# Altium PCB sensor_board.PcbDoc
Units mil, origin at the board's own origin, x right, y up, seen from the top; angles counter-clockwise.
Board outline 3088 x 2050 mil, 2 copper layers (Top, Bottom), stack 61.811 mil thick; 13 components, 13 nets, 45 pads, 4 vias.
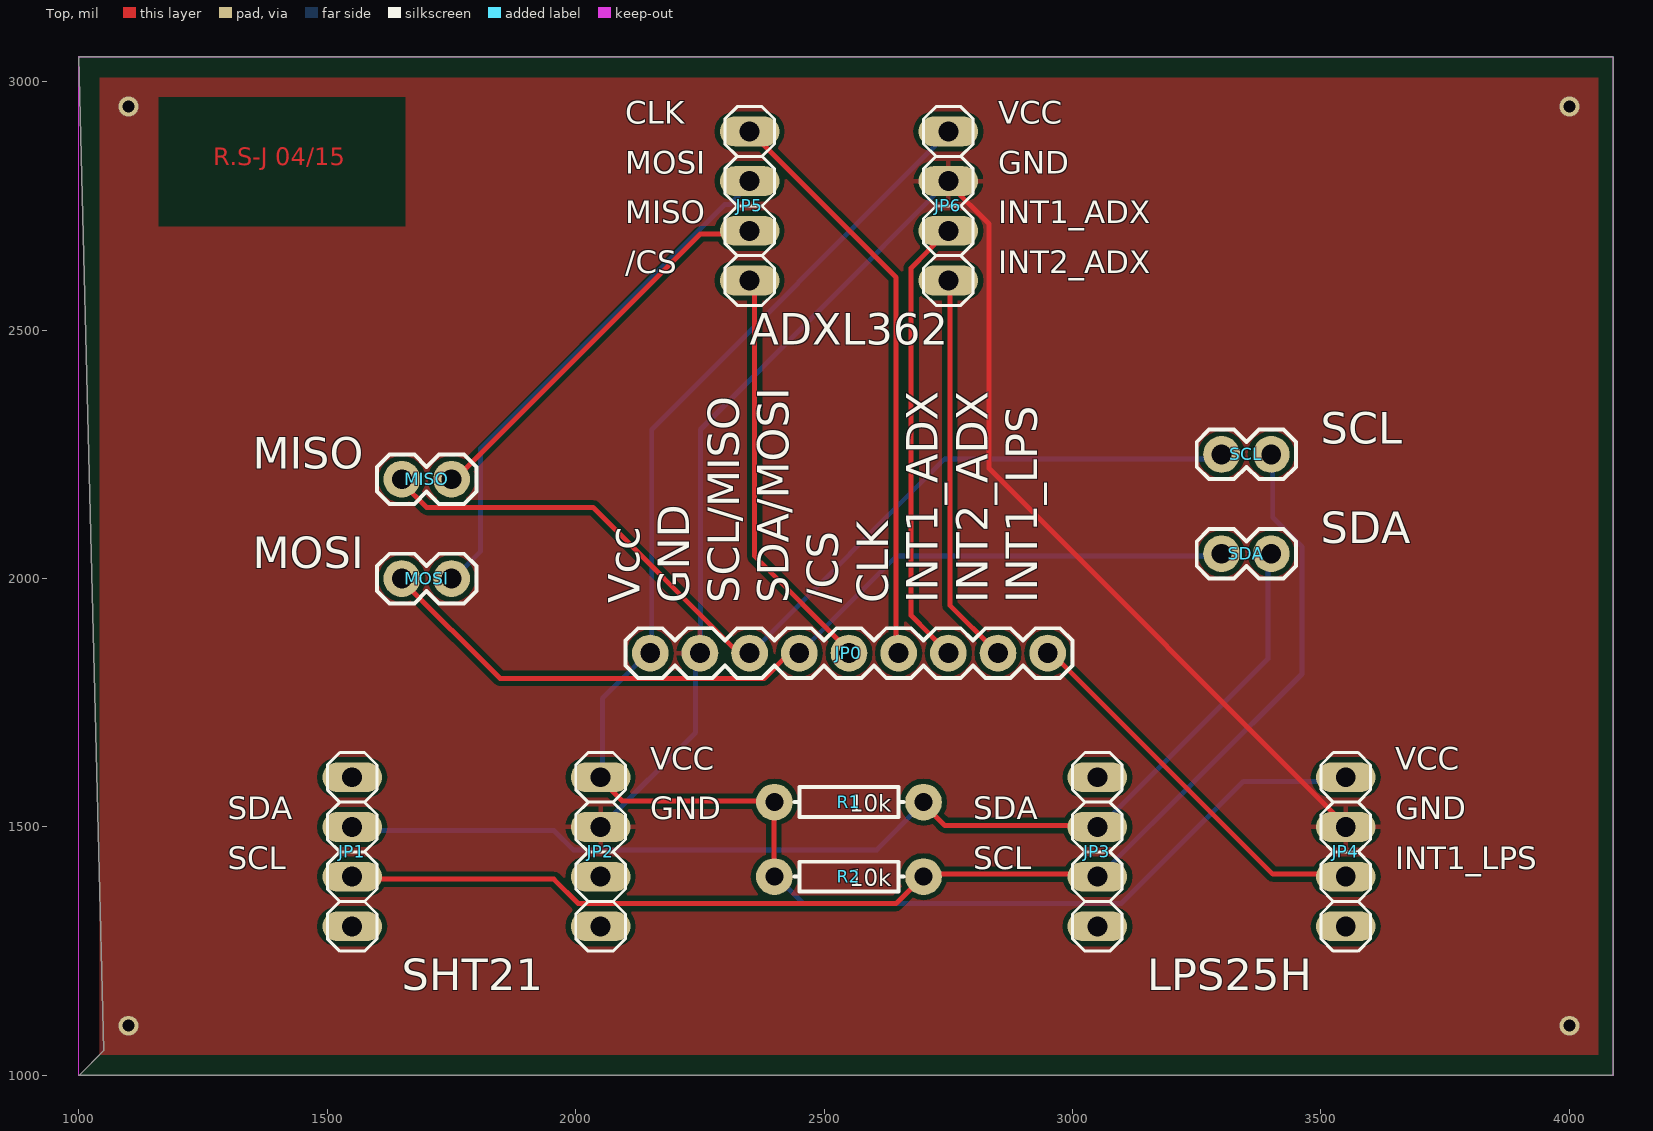
[diagram p0: Top view]
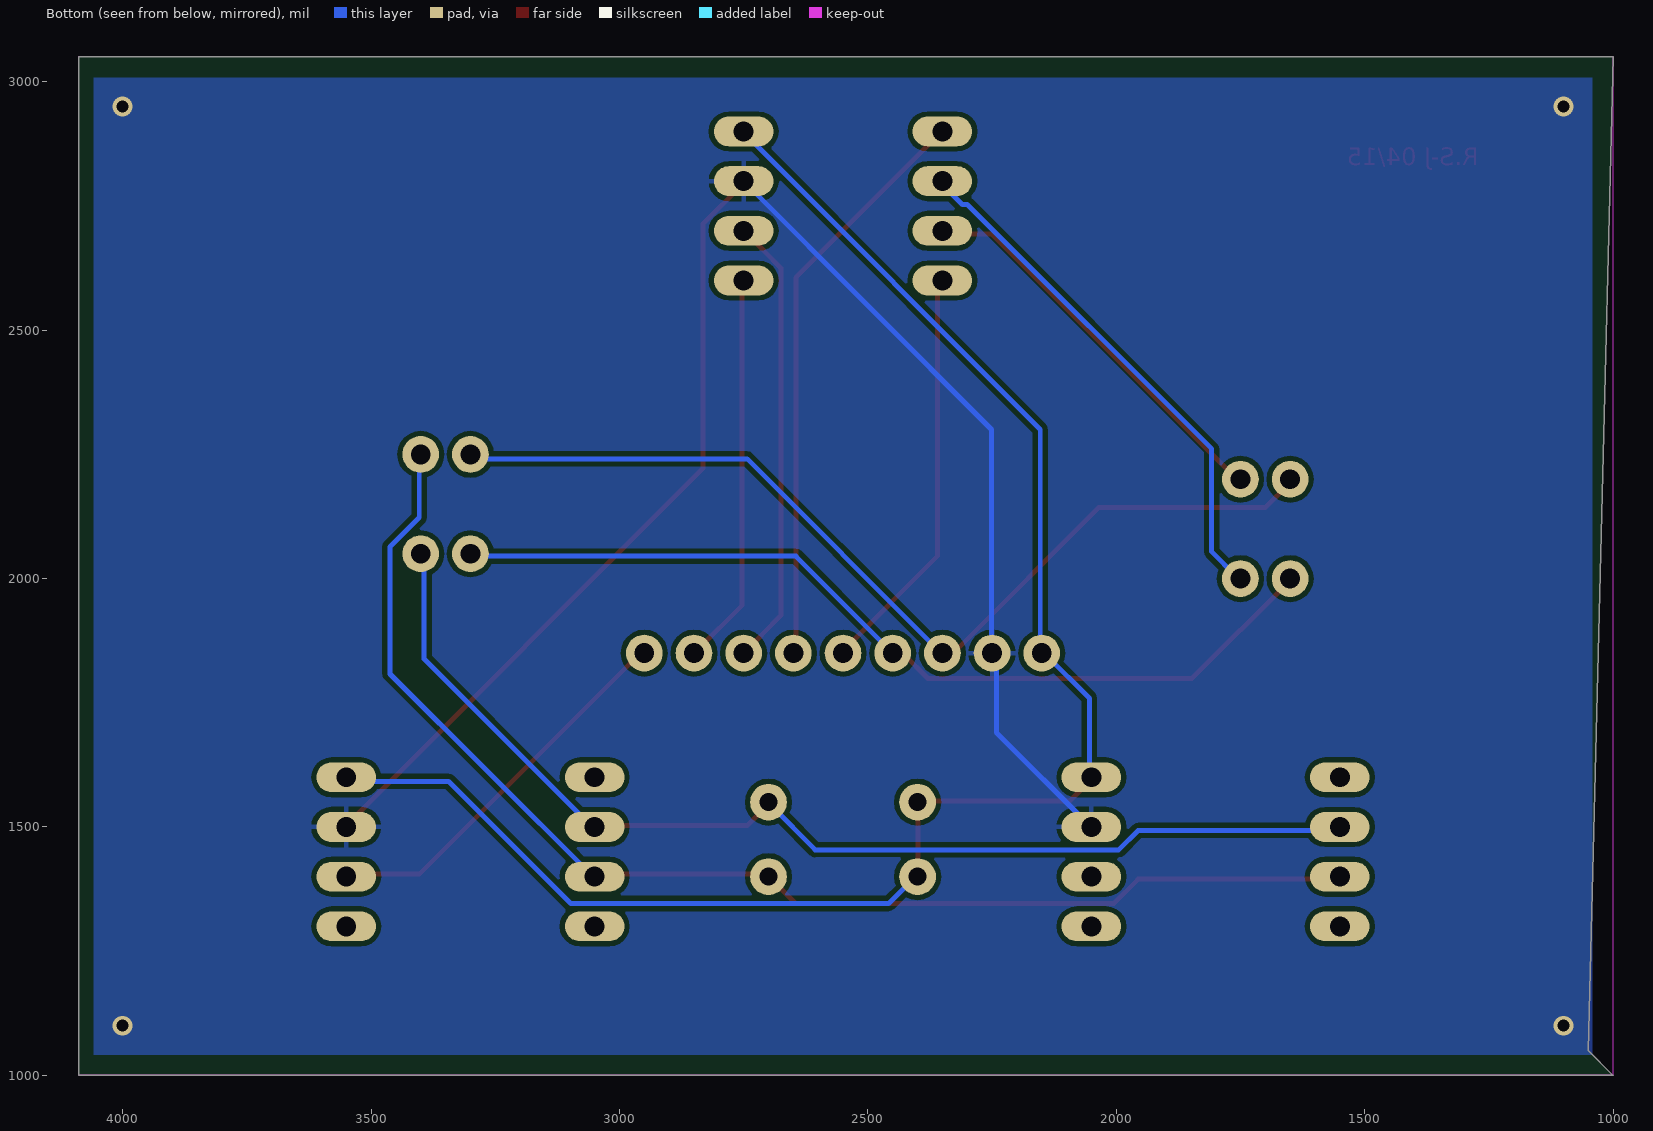
[diagram p1: Bottom view, seen from below]

## Layer stack, top to bottom
Top Solder: solder mask 0.4, Solder Resist, Dk 3.5
Top: signal copper 1.378
Dielectric 1: core 59.0551, FR-4, Dk 4.8
Bottom: signal copper 1.378
Bottom Solder: solder mask 0.4, Solder Resist, Dk 3.5

## Board outline
1000,1000 4088,1000 4088,3050 1000,3050 1050,1050

## Design rules (kind name [scope] priority, off if disabled: settings)
Clearance mdViaVia [IsVia vs IsVia] p1: gap=9.84
Clearance mdPadVia [IsPad vs IsVia] p2: gap=9.84
Clearance mdPadPad [IsPad vs IsPad] p3: gap=9.84
Clearance mdWireVia [(InLayerClass('Signal Layers') AND IsTrack) vs IsVia] p4: gap=9.84
Clearance mdWirePad [(InLayerClass('Signal Layers') AND IsTrack) vs IsPad] p5: gap=9.84
Clearance mdWireWire [(InLayerClass('Signal Layers') AND IsTrack) vs (InLayerClass('Signal Layers') AND IsTrack)] p6: gap=9.84
Clearance [All] p7: gap=9.84
HoleSize [All] p1: absolutevalues=TRUE maxlimit=100000 minlimit=11.81 maxpercent=80.000 minpercent=20.000
HoleToHoleClearance [All] p1: gap=8 allowstackedmicrovias=TRUE
PolygonConnect ThermalVias [IsVia] p1: connectstyle=Direct reliefconductorwidth=10 reliefentries=4 polygonreliefangle="90 Angle" airgapwidth=10
PolygonConnect [All] p2: connectstyle=Relief reliefconductorwidth=10 reliefentries=4 polygonreliefangle="90 Angle" airgapwidth=10
RoutingVias [All] p1: holewidth=28 width=50 viastyle="Through Hole" minholewidth=28 minwidth=50 maxholewidth=28 maxwidth=50
SilkToSilkClearance [All] p1 off: silktosilkclearance=10
SilkToSolderMaskClearance [IsPad] p1 off: minsilkscreentomaskgap=10 clearancetoexposedcopper=TRUE
SolderMaskExpansion [All] p1: expansion=4
UnpouredPolygon [All] p1: allowunpoured=FALSE
Width [All] p1: maxlimit=100000 minlimit=9.84 preferedwidth=10
25 further rules are at their usual default settings.

## Components (designator, comment, footprint, x,y, rotation, side; value= is the part's Value field where it differs from the comment)
JP0 "" 1X09 2150,1850 r0 top
JP1 "" 1X04 1550,1450 r270 top
JP2 "" 1X04 2050,1450 r270 top
JP3 "" 1X04 3050,1450 r270 top
JP4 "" 1X04 3550,1450 r270 top
JP5 "" 1X04 2350,2750 r270 top
JP6 "" 1X04 2750,2750 r270 top
MISO "" 1X02 1650,2200 r0 top
MOSI "" 1X02 1650,2000 r0 top
R1 "10k" AXIAL-0.3 2550,1550 r180 top
R2 "10k" AXIAL-0.3 2550,1400 r180 top
SCL "" 1X02 3300,2250 r0 top
SDA "" 1X02 3300,2050 r0 top

## Footprints (in the part's own frame and the unit in brackets; to place one, negate y for a bottom-side part, rotate by r counter-clockwise, add the part's x,y. Pads: shape width x height; smd on the part's side, far side on the other; paste and mask are expansions set on the pad)
1X02 [mil] "1X02"
  round 74 hole 40: 1(0,0) 2(100,0)
  silkscreen extent -50,-50 150,50
1X04 [mil] "1X04"
  oval 60x120 hole 40: 1(-150,0) 2(-50,0) 3(50,0) 4(150,0)
  silkscreen extent -200,-50 200,50
1X09 [mil] "1X09"
  round 74 hole 40: 1(0,0) 2(100,0) 3(200,0) 4(300,0) 5(400,0) 6(500,0) 7(600,0) 8(700,0) 9(800,0)
  silkscreen extent -50,-50 850,50
AXIAL-0.3 [mil] "AXIAL-0.3"
  round 74 hole 36: P$1(-150,0) P$2(150,0)
  silkscreen extent -110,-30 110,30

## Part data
JP0: library part 1X09
JP1 JP2 JP3 JP4 JP5 JP6: library part 1X04
MISO MOSI SCL SDA: library part 1X02
R1 R2: library part AXIAL-0.3

## Via types
v1: diameter 40/40 (per signal layer), hole 24, Top to Bottom, 4 vias

## Nets (pads, with @x,y where several pads share a name; then routed paths per layer and width w, separated by ;. In a path a pad name is that pad's centre, name@x,y a point inside that pad or via, vN(x,y) a via of type N, cw(c..) or ccw(c..) an arc to the next point about the centre after c; other vN are vias at no path point)
/CS: JP0.5 JP5.4 | length 834.8
  Top w10: JP5.4 2360,2596 2360,2045 2547,1858 JP0.5
CLK: JP0.6 JP5.1 | length 1173.9
  Top w10: JP5.1 2360,2891 2645,2606 2645,1858 JP0.6
GND: JP0.2 JP2.2 JP4.2 JP6.2 | length 3223.6
  Top w10: JP6.2 2753,2793 2832,2714 2832,2222 3550,1503 JP4.2
  Bottom w10: JP2.2 2054,1503 2241,1690 2241,1848 JP0.2 2251,1858 2251,2300 2743,2793 JP6.2
  other v1: 1100,1100 4000,1100 1100,2950 4000,2950
INT1_ADX: JP0.7 JP6.3 | length 911.9
  Top w10: JP0.7 2675,1926 2675,2625 2743,2694 JP6.3
INT1_LPS: JP0.9 JP4.3 | length 788.7
  Top w10: JP0.9 2960,1848 3403,1405 3550,1405 JP4.3
INT2_ADX: JP0.8 JP6.4 | length 791.5
  Top w10: JP6.4 2753,2596 2753,1946 2842,1858 JP0.8
MISO: JP5.3 MISO.2 | length 810
  Top w10: MISO.2 1759,2202 2251,2694 2350,2694 JP5.3
MOSI: JP5.2 MOSI.2 | length 1056
  Bottom w10: MOSI.2 1759,2005 1808,2054 1808,2261 2300,2753 2310,2753 2350,2793 JP5.2
SCL: JP1.3 JP3.3 R2.P$1 SCL.2 | length 2599.3
  Top w10: JP1.3 1552,1395 1956,1395 2005,1346 2645,1346 2694,1395 R2.P$1 2704,1405 3049,1405 JP3.3
  Bottom w10: JP3.3 3058,1405 3462,1808 3462,2064 3403,2123 3403,2241 SCL.2
SCL/MISO: JP0.3 MISO.1 SCL.1 | length 1970.2
  Top w10: MISO.1 1651,2192 1700,2143 2035,2143 2320,1858 2350,1858 JP0.3
  Bottom w10: JP0.3 2360,1858 2743,2241 3295,2241 SCL.1
SDA: JP1.2 JP3.2 R1.P$1 SDA.2 | length 2282.8
  Top w10: R1.P$1 2704,1543 2743,1503 3049,1503 JP3.2
  Bottom w10: JP1.2 1552,1493 1956,1493 1995,1454 2606,1454 2694,1543 R1.P$1 ; JP3.2 3058,1503 3393,1838 3393,2045 SDA.2
SDA/MOSI: JP0.4 MOSI.1 SDA.1 | length 1839
  Top w10: MOSI.1 1651,1995 1848,1799 2379,1799 2428,1848 2448,1848 JP0.4
  Bottom w10: JP0.4 2458,1858 2645,2045 3295,2045 SDA.1
VCC: JP0.1 JP2.1 JP4.1 JP6.1 R1.P$2 R2.P$2 | length 3396.1
  Top w10: JP2.1 2054,1592 2094,1552 2399,1552 R1.P$2 2399,1543 2399,1405 R2.P$2
  Bottom w10: JP2.1 2054,1602 2054,1759 2143,1848 JP0.1 2153,1858 2153,2300 2743,2891 JP6.1 ; R2.P$2 2409,1395 2458,1346 3098,1346 3344,1592 3550,1592 JP4.1
pads on no net: JP1.1 JP1.4 JP2.3 JP2.4 JP3.1 JP3.4 JP4.4

## Polygon pours and split planes (outlines as drawn)
GND on Bottom "Bottom-GND 1" (solid, remove dead copper, pour order 6): 1042,3008 4058,3008 4058,1042 1042,1042
GND on Bottom "Bottom-GND" (solid, remove dead copper, pour order 2): 1042,3008 4058,3008 4058,1042 1042,1042
GND on Top "Top-GND" (solid, remove dead copper, pour order 4): 1042,3008 4058,3008 4058,1042 1042,1042

## Keep-outs
Keep-Out Layer:
  lines w0: 1000,1000 1000,3050 4088,3050 4088,1000 1000,1000

## Other copper
Top:
  text "R.S-J 04/15" at 1270,2820 h60

## Silkscreen, mask and mechanical layers (free items; w line width, h text height)
Top Overlay:
  text "CLK" at 2100,2900 h77.5
  text "VCC" at 2850,2900 h77.5
  text "MOSI" at 2100,2800 h77.5
  text "GND" at 2850,2800 h77.5
  text "MISO" at 2100,2700 h77.5
  text "INT1_ADX" at 2850,2700 h77.5
  text "/CS" at 2100,2600 h77.5
  text "INT2_ADX" at 2850,2600 h77.5
  text "ADXL362" at 2350,2450 h108.5
  text "SCL" at 3500,2250 h108.5
  text "MISO" at 1350,2200 h108.5
  text "SDA" at 3500,2050 h108.5
  text "MOSI" at 1350,2000 h108.5
  text "Vcc" at 2150,1950 h108.5 r90
  text "GND" at 2250,1950 h108.5 r90
  text "SCL/MISO" at 2350,1950 h108.5 r90
  text "SDA/MOSI" at 2450,1950 h108.5 r90
  text "/CS" at 2550,1950 h108.5 r90
  text "CLK" at 2650,1950 h108.5 r90
  text "INT1_ADX" at 2750,1950 h108.5 r90
  text "INT2_ADX" at 2850,1950 h108.5 r90
  text "INT1_LPS" at 2950,1950 h108.5 r90
  text "VCC" at 2150,1600 h77.5
  text "VCC" at 3650,1600 h77.5
  text "SDA" at 1300,1500 h77.5
  text "GND" at 2150,1500 h77.5
  text "SDA" at 2800,1500 h77.5
  text "GND" at 3650,1500 h77.5
  text "SCL" at 1300,1400 h77.5
  text "SCL" at 2800,1400 h77.5
  text "INT1_LPS" at 3650,1400 h77.5
  text "SHT21" at 1650,1150 h108.5
  text "LPS25H" at 3150,1150 h108.5
Dimension:
  lines w0: 1000,1000 1000,3050 4088,3050 4088,1000 1000,1000